# Altium PCB RD15002_SingleSCT-20151223.PcbDoc
Units mil, origin at the board's own origin, x right, y up, seen from the top; angles counter-clockwise.
Board outline 5758.03 x 3395.83 mil, 2 copper layers (Top Layer, Bottom Layer); 208 components, 168 nets, 643 pads, 210 vias.
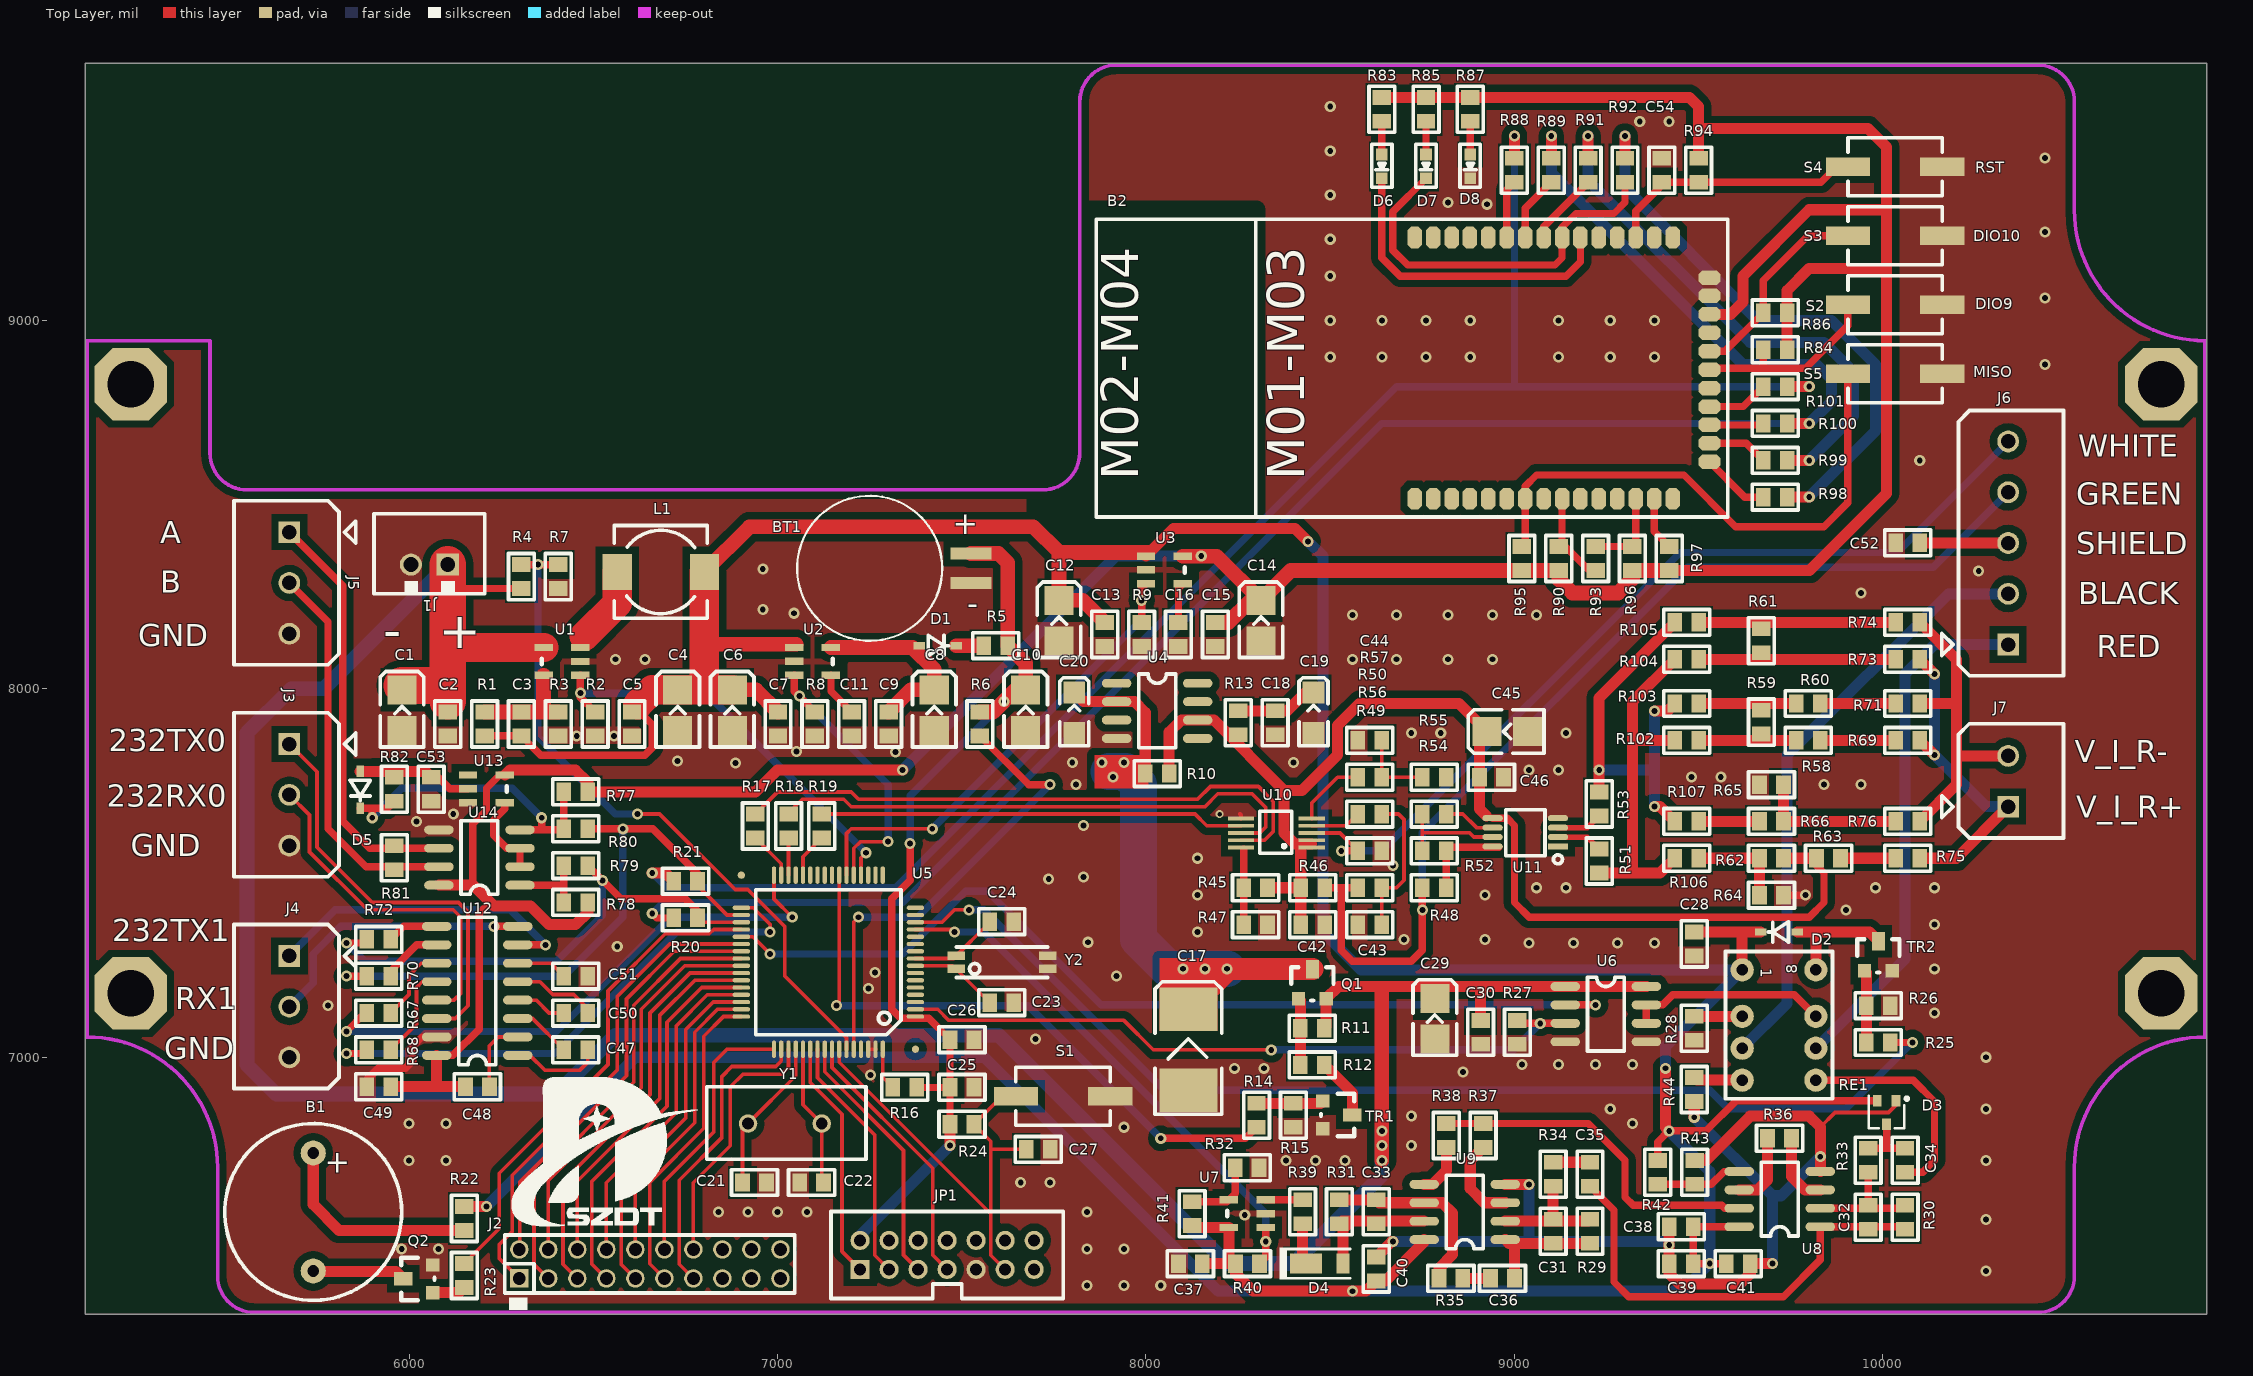
[diagram p0: Top Layer view]
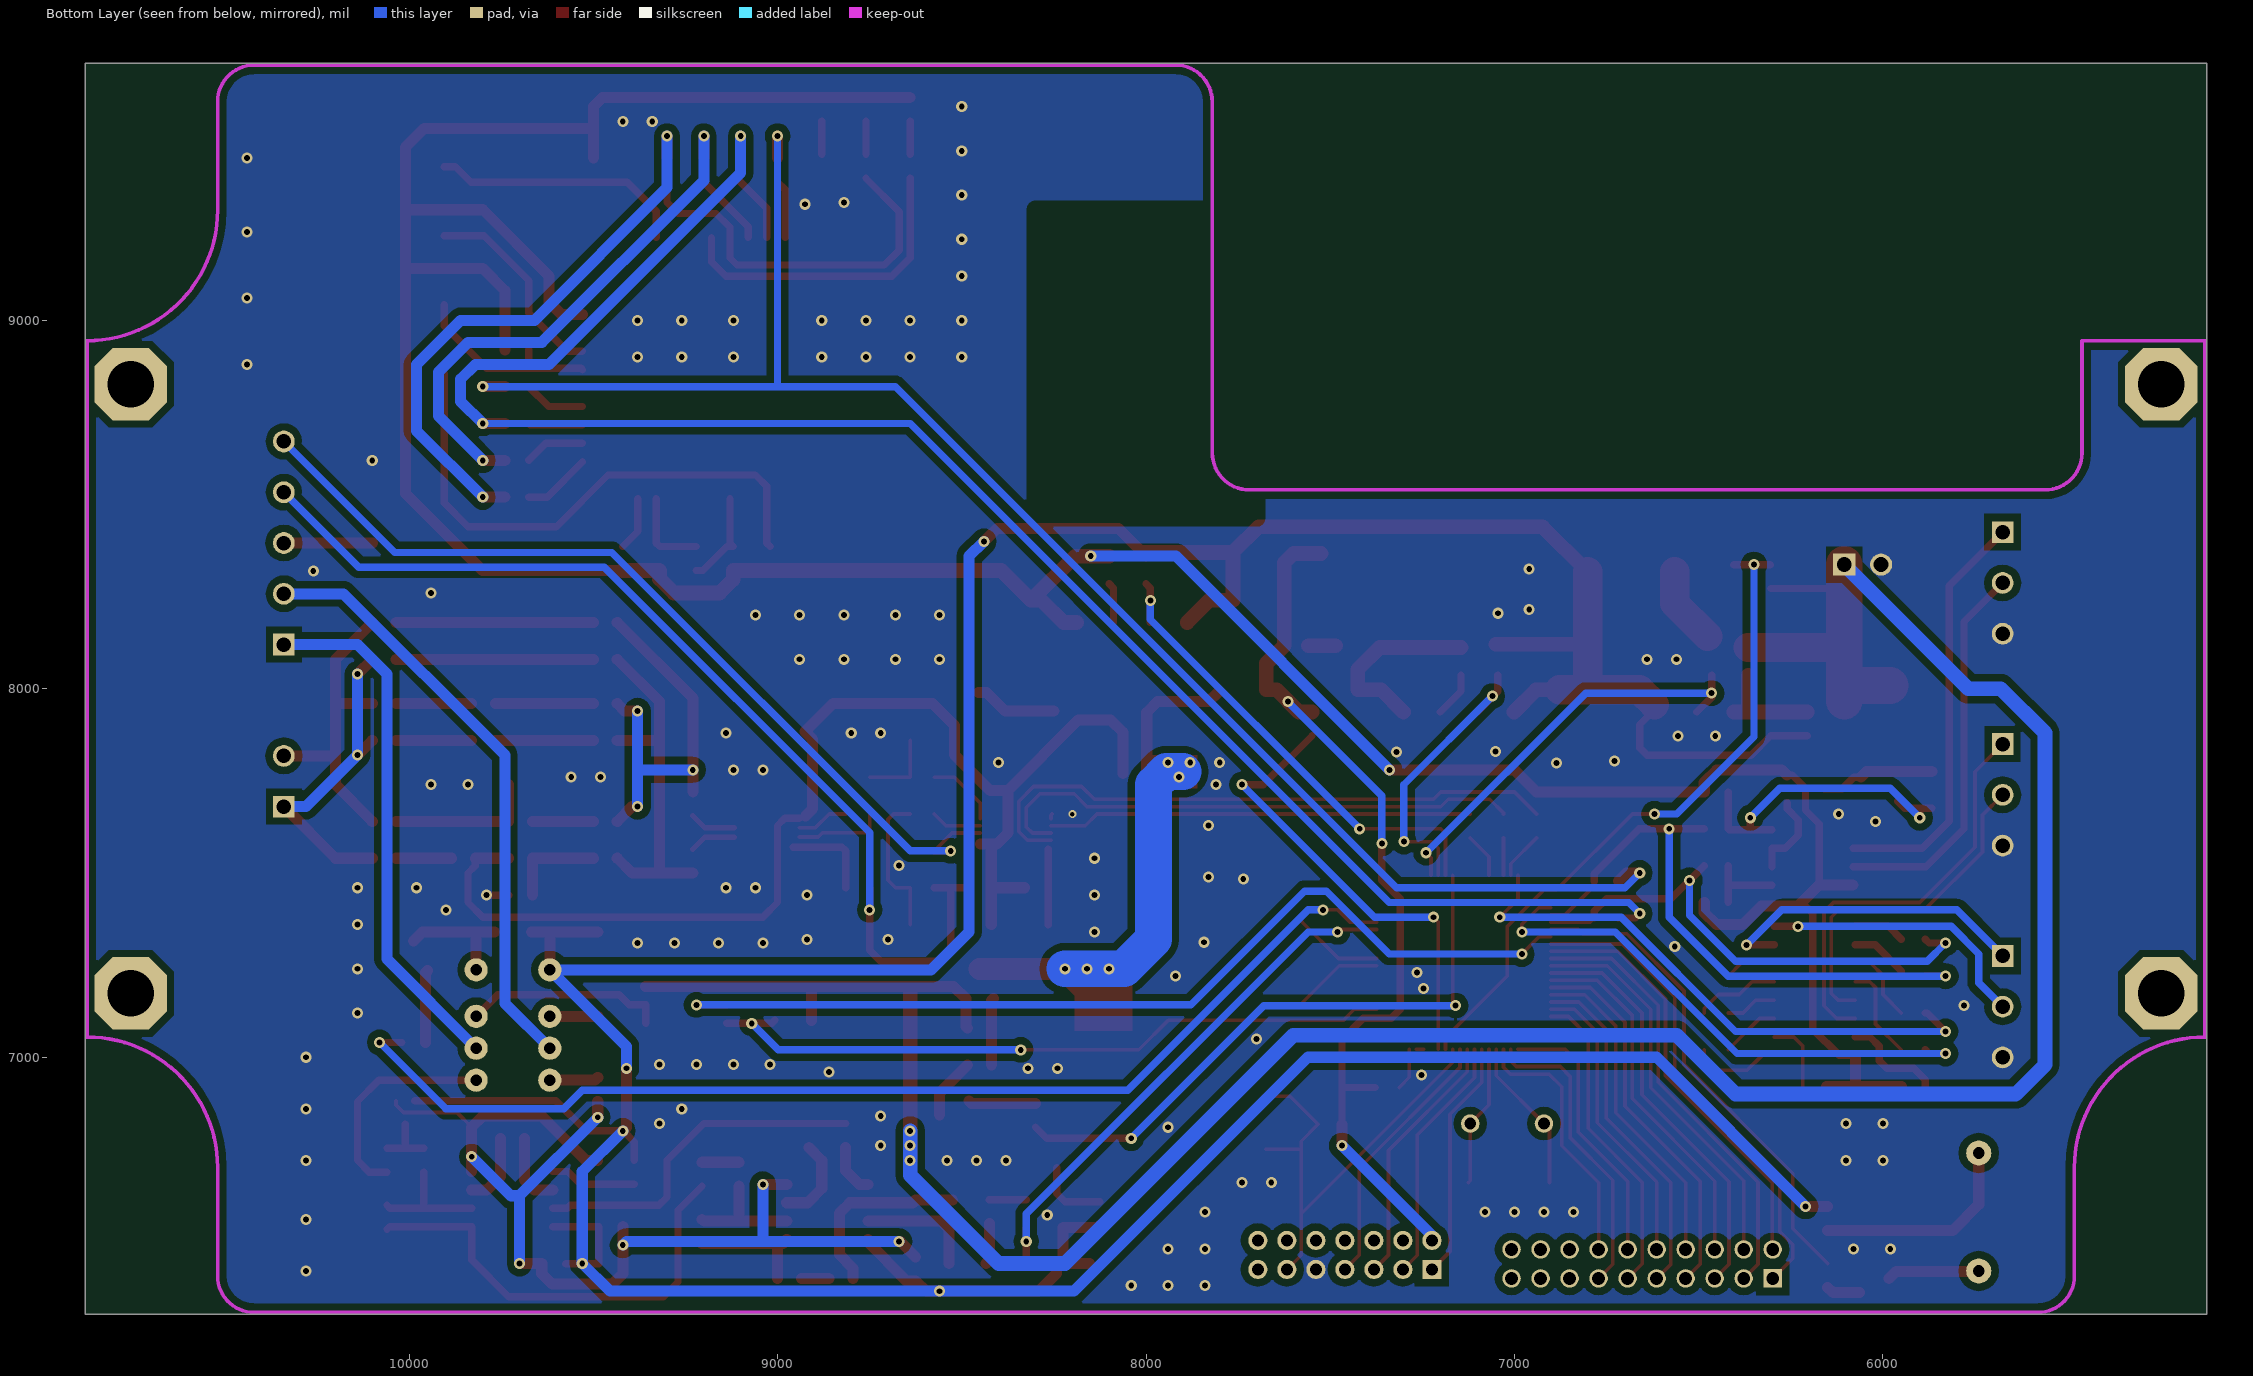
[diagram p1: Bottom Layer view, seen from below]

## Layer stack, top to bottom
Top Layer: signal copper 1.4
Dielectric: dielectric 12.6, FR-4, Dk 4.8
Bottom Layer: signal copper 1.4

## Board outline
5121,6301.97 10879.03,6301.97 10879.03,9697.8 5121,9697.8

## Design rules (kind name [scope] priority, off if disabled: settings)
Clearance [All] p1: gap=6
ComponentClearance [All] p1 off: gap=10 collisioncheckmode=3 verticalgap=10 showdistances=FALSE
HoleSize [All] p1: absolutevalues=TRUE maxlimit=1000 minlimit=1 maxpercent=80.000 minpercent=20.000
MinimumSolderMaskSliver [All] p1 off: minsoldermaskwidth=10
NetAntennae [All] p1 off: netantennaetolerance=0
PolygonConnect [All] p1: connectstyle=Direct reliefconductorwidth=10 reliefentries=4 polygonreliefangle="90 Angle" airgapwidth=10
RoutingPriority [All] p1: routingpriority=1
RoutingVias [All] p1: holewidth=20 width=50 viastyle="Through Hole" minholewidth=28 minwidth=50 maxholewidth=28 maxwidth=50
SilkToSilkClearance [All] p1 off: silktosilkclearance=10
SilkToSolderMaskClearance [IsPad] p1 off: minsilkscreentomaskgap=10 clearancetoexposedcopper=TRUE
SolderMaskExpansion [All] p1: expansion=4
Width [All] p1: maxlimit=1000 minlimit=10 preferedwidth=10
21 further rules are at their usual default settings.

## Components (designator, comment, footprint, x,y, rotation, side; value= is the part's Value field where it differs from the comment)
B1 "BEEP" BUZZER-5V 5740,6740 r270 top
B2 "JN5139" JN5139 8729.17,8516 r90 top
BT1 "MS920T" MS920T 7525,8367 r0 top
C1 "22uF/16V" CB3528 5981,7997 r270 top
C2 "0.1uF" CC0603 6105.06,7872 r90 top
C3 "100pF" CC0603 6305.06,7937 r270 top
C4 "22uF/16V" CB3528 6729.11,7997 r270 top
C5 "0.1uF" CC0603 6605.06,7872 r90 top
C6 "22uF/16V" CB3528 6877.22,7997 r270 top
C7 "0.1uF" CC0603 7001.28,7872 r90 top
C8 "22uF/16V" CB3528 7425.33,7997 r270 top
C9 "0.1uF" CC0603 7301.28,7872 r90 top
C10 "22uF/16V" CB3528 7673.44,7997 r270 top
C11 "0.1uF" CC0603 7201.28,7872 r90 top
C12 "22uF/16V" CB3528 7764.06,8240 r270 top
C13 "0.1uF" CC0603 7888.11,8115 r90 top
C14 "22uF/16V" CB3528 8312.17,8240 r270 top
C15 "0.1uF" CC0603 8188.11,8115 r90 top
C16 "0.1uF" CC0603 8088.11,8115 r90 top
C17 "100uF/20V" CD7343 8115,7130 r270 top
C18 "0.1uF" CC0603 8350.37,7875 r90 top
C19 "4.7uF/10V" CA3216 8454.74,7990 r270 top
C20 "10uF/16V" CA3216 7805,7990 r270 top
C21 "22pF" CC0603 6970,6660 r180 top
C22 "22pF" CC0603 7060,6660 r0 top
C23 "22pF" CC0603 7576,7148 r0 top
C24 "22pF" CC0603 7576,7368 r0 top
C25 "0.1uF" CC0603 7533,6918 r180 top
C26 "0.1uF" CC0603 7533,7048 r180 top
C27 "1uF" CC0603 7740,6750 r180 top
C28 "0.1uF" CC0603 9488,7340 r270 top
C29 "22uF/16V" CB3528 8783.94,7160 r270 top
C30 "0.1uF" CC0603 8908,7035 r90 top
C31 "100pF" CC0603 9105,6495 r90 top
C32 "100pF" CC0603 9960,6533 r90 top
C33 "100pF" CC0603 8625,6548 r90 top
C34 "0.1uF" CC0603 10060,6753 r270 top
C35 "0.1uF" CC0603 9205,6715 r270 top
C36 "0.1uF" CC0603 8935,6400 r0 top
C37 "0.1uF" CC0603 8088,6440 r0 top
C38 "0.1uF" CC0603 9420,6540 r0 top
C39 "0.1uF" CC0603 9420,6440 r0 top
C40 "1uF" CC0603 8625,6458 r270 top
C41 "1uF" CC0603 9640,6440 r180 top
C42 "0.1uF" CC0603 8485,7360 r180 top
C43 "1000pF" CC0603 8575,7360 r0 top
C44 "0.1uF" CC0603 8575,7860 r0 top
C45 "22uF/16V" CB3528 8925,7884.06 r0 top
C46 "0.1uF" CC0603 8970,7760 r180 top
C47 "0.1uF" CC0603 6420,7020 r0 top
C48 "0.1uF" CC0603 6218,6920 r180 top
C49 "0.1uF" CC0603 5885,6920 r0 top
C50 "0.1uF" CC0603 6485,7120 r180 top
C51 "0.1uF" CC0603 6485,7220 r180 top
C52 "Cap" CC0603 10035,8396 r0 top
C53 "100pF" CC0603 6060,7695 r90 top
C54 "1uF" CC0603 9400,9440 r270 top
D1 "CMDSH-3" SOD323 7385,8117 r0 top
D2 "CMDSH-3" SOD323 9768,7340 r180 top
D3 "DESD1P0RFW-7" SOT-323 10010,6850 r270 top
D4 "DFLS1200-7" powerDI123 8485,6440 r0 top
D5 "1N4148" SOD323 5867.44,7775.75 r270 top
D6 "LED" D0603 8640,9450 r270 top
D7 "LED" D0603 8760,9450 r270 top
D8 "LED" D0603 8880,9450 r270 top
J1 "BAT" CON2-2.54MM 6105,8337 r180 top
J2 "Header2*10" IDC20-2.0MM 6299.11,6399.63 r0 top
J3 "COM2" ECH350H-3P 5675,7850 r270 top
J4 "COM2" ECH350H-3P 5675,7275 r270 top
J5 "COM3" ECH350H-3P 5675,8425 r270 top
J6 "CON5" ECH350H-5P 10340,8120 r90 top
J7 "CON2" ECH350H-2P 10340,7680 r90 top
JP1 "JTAG" IDC14-2.0MM 7224,6424 r0 top
L1 "10uH" SLF6025 6565,8317 r0 top
Q1 "CJ2301" SOT-23W 8414,7159 r0 top
Q2 "MMBT3904" SOT-23W 6064,6361 r90 top
R1 "105K" CC0603 6205.06,7872 r90 top
R2 "100K" CC0603 6505.06,7937 r270 top
R3 "20K" CC0603 6405.06,7937 r270 top
R4 "300K" CC0603 6305,8272 r90 top
R5 "22R" CC0603 7625,8117 r180 top
R6 "100R" CC0603 7549.39,7872 r90 top
R7 "100K" CC0603 6405,8337 r270 top
R8 "100K" CC0603 7101.28,7937 r270 top
R9 "100K" CC0603 7988.11,8180 r270 top
R10 "357R" CC0603 8063,7770 r180 top
R11 "10K" CC0603 8419,7079 r0 top
R12 "10K" CC0603 8419,6979 r0 top
R13 "0R" CC0603 8250.37,7940 r270 top
R14 "10K" CC0603 8300,6875 r270 top
R15 "100K" CC0603 8400,6810 r90 top
R16 "22R" CC0603 7313,6918 r0 top
R17 "22R" CC0603 6940,7595 r90 top
R18 "22R" CC0603 7030,7595 r90 top
R19 "22R" CC0603 7120,7595 r90 top
R20 "0R" CC0603 6783,7378 r180 top
R21 "0R" CC0603 6783,7478 r180 top
R22 "470" CC0603 6150,6530 r90 top
R23 "1K" CC0603 6150,6375 r90 top
R24 "10K" CC0603 7533,6818 r180 top
R25 "10K" CC0603 9955,7040 r0 top
R26 "100K" CC0603 10020,7140 r180 top
R27 "100K" CC0603 9008,7100 r270 top
R28 "1K" CC0603 9488,7111 r270 top
R29 "100K" CC0603 9205,6495 r90 top
R30 "100K" CC0603 10060,6533 r90 top
R31 "100K" CC0603 8525,6548 r90 top
R32 "100K" CC0603 8242,6700 r0 top
R33 "4.7K" CC0603 9960,6688 r90 top
R34 "4.7K" CC0603 9105,6650 r90 top
R35 "4.7K" CC0603 8795,6400 r0 top
R36 "0R" CC0603 9752,6780 r180 top
R37 "0R" CC0603 8915,6755 r90 top
R38 "0R" CC0603 8815,6755 r90 top
R39 "1K" CC0603 8425,6613 r270 top
R40 "10K" CC0603 8243,6440 r0 top
R41 "100K" CC0603 8125,6543 r90 top
R42 "100K 1%" CC0603 9389,6720 r270 top
R43 "100K 1%" CC0603 9489,6655 r90 top
R44 "1K" CC0603 9488,6945 r270 top
R45 "0R" CC0603 8330,7460 r180 top
R46 "12K" CC0603 8420,7460 r0 top
R47 "0R" CC0603 8265,7360 r0 top
R48 "0R" CC0603 8815,7460 r180 top
R49 "25R" CC0603 8575,7460 r0 top
R50 "5K" CC0603 8640,7660 r180 top
R51 "0R" CC0603 9230,7500 r90 top
R52 "92.6K 1%" CC0603 8750,7560 r0 top
R53 "0R" CC0603 9230,7720 r270 top
R54 "2.49K 1%" CC0603 8815,7660 r180 top
R55 "25R" CC0603 8815,7760 r180 top
R56 "0R" CC0603 8640,7560 r180 top
R57 "5K" CC0603 8640,7760 r180 top
R58 "10K" CC0603 9830,7860 r180 top
R59 "10K" CC0603 9670,7877 r90 top
R60 "10K" CC0603 9765,7960 r0 top
R61 "100R" CC0603 9670,8098 r90 top
R62 "1K" CC0603 9665,7540 r0 top
R63 "0R" CC0603 9885,7540 r180 top
R64 "1K" CC0603 9665,7440 r0 top
R65 "1K" CC0603 9665,7740 r0 top
R66 "0R" CC0603 9730,7640 r180 top
R67 "0R" CC0603 5950,7120 r180 top
R68 "0R" CC0603 5950,7020 r180 top
R69 "0R" CC0603 10100,7860 r180 top
R70 "0R" CC0603 5950,7220 r180 top
R71 "0R" CC0603 10100,7960 r180 top
R72 "0R" CC0603 5950,7320 r180 top
R73 "0R" CC0603 10100,8080 r180 top
R74 "0R" CC0603 10100,8180 r180 top
R75 "0R" CC0603 10100,7540 r180 top
R76 "0R" CC0603 10100,7640 r180 top
R77 "10K" CC0603 6420,7720 r0 top
R78 "10K" CC0603 6485,7420 r180 top
R79 "0R" CC0603 6485,7520 r180 top
R80 "0R" CC0603 6485,7620 r180 top
R81 "120R" CC0603 5960,7574 r270 top
R82 "10K" CC0603 5960,7695 r90 top
R83 "200R" CC0603 8640,9540 r90 top
R84 "2.2K" CC0603 9740.17,8920 r180 top
R85 "200R" CC0603 8760,9540 r90 top
R86 "2.2K" CC0603 9740.17,9020 r180 top
R87 "200R" CC0603 8880,9540 r90 top
R88 "0R" CC0603 9000,9440 r270 top
R89 "0R" CC0603 9100,9440 r270 top
R90 "2.2K" CC0603 9120.17,8321 r90 top
R91 "0R" CC0603 9200,9440 r270 top
R92 "0R" CC0603 9300,9440 r270 top
R93 "0R" CC0603 9220.17,8321 r90 top
R94 "10K" CC0603 9500,9440 r270 top
R95 "10K" CC0603 9020.17,8321 r90 top
R96 "2.2K" CC0603 9320.17,8321 r90 top
R97 "2.2K" CC0603 9420.17,8321 r90 top
R98 "0R" CC0603 9675.17,8520 r0 top
R99 "0R" CC0603 9675.17,8620 r0 top
R100 "0R" CC0603 9675.17,8720 r0 top
R101 "0R" CC0603 9675.17,8820 r0 top
R102 "0R" CC0603 9435,7860 r0 top
R103 "0R" CC0603 9435,7960 r0 top
R104 "0R" CC0603 9435,8080 r0 top
R105 "0R" CC0603 9435,8180 r0 top
R106 "0R" CC0603 9435,7540 r0 top
R107 "0R" CC0603 9435,7640 r0 top
RE1 "G6K" G6K 9618,7237 r270 top
S1 "RESET" SPST 7903,6894 r180 top
S2 "DIO9" SPST 9905,9042.04 r0 top
S3 "DIO10" SPST 9905,9229.52 r0 top
S4 "RST" SPST 9905,9417 r0 top
S5 "MISO" SPST 9905,8854.56 r0 top
TR1 "MMBT3904" SOT-23W 8480,6881 r270 top
TR2 "MMBT3904" SOT-23W 9950,7235 r0 top
U1 "TPS560200" SOT-23-5 6465,8037 r270 top
U2 "LP2985-25" SOT-23-5 7045,8112 r90 top
U3 "LP2985-25" SOT-23-5 8000,8360 r90 top
U4 "LT1019AIS8-5" SO-8 7920.37,8015 r0 top
U5 "MSP430F1X/2X/4X" LQFP64 7138,7258 r180 top
U6 "FAN3122" SO-8 9138,7192 r0 top
U7 "TLV3491AID" SOT-23-5 8325,6538 r270 top
U8 "LT1807" SO-8 9830,6540 r180 top
U9 "LT1807" SO-8 8975,6505 r180 top
U10 "LTC2402" MS10 8450,7569 r90 top
U11 "AD8420" MSOP8 9118,7572 r180 top
U12 "MAX3232" SO-16 6295,7005 r180 top
U13 "74HC1G14" SOT-23-5 6160,7766 r90 top
U14 "SN65HVD72/75/78" SO-8 6301,7467 r180 top
Y1 "1M" XCYAI 7020,6820 r180 top
Y2 "32.768KHz" MC-146 7485,7240 r0 top
? "" LOGO 6505,6745 r0 top

## Footprints (in the part's own frame and the unit in brackets; to place one, negate y for a bottom-side part, rotate by r counter-clockwise, add the part's x,y. Pads: shape width x height; smd on the part's side, far side on the other; paste and mask are expansions set on the pad)
BUZZER-5V [mil]
  round 68 hole 32: 1(0,0) 2(320,0)
  silkscreen extent -80,-240 400,240
CA3216 [mm]
  rect 1.5x1.5 smd: 1(0,0) 2(2.794,0)
  silkscreen extent -1.02,-1 3.68,1
CB3528 [mm]
  rect 2x2 smd: 1(0,0) 2(2.794,0)
  silkscreen extent -1.27,-1.5 3.94,1.5
CC0603 [mil]
  rect 40x50 smd: 1(0,0) 2(65,0)
  silkscreen extent -30,-35 95,35
CD7343 [mm]
  rect 3x4 smd: 1(0,0) 2(5.588,0)
  silkscreen extent -1.91,-2.3 7.24,2.3
CON2-2.54MM [mil]
  rect 60x60 hole 40: 1(0,0)
  round 60 hole 40: 2(100,0)
  silkscreen extent -100,-138 200,79
D0603 [mm]
  rect 0.8x0.8 smd: 1(0,0) 2(1.65,0)
  silkscreen extent -0.7,-0.7 2.25,0.7
ECH350H-2P [mm]
  rect 1.5x1.5 hole 1: 1(0,0)
  round 1.5 hole 1: 2(3.5,0)
  silkscreen extent -2.16,-3.81 5.71,4.57
ECH350H-3P [mm]
  rect 1.5x1.5 hole 1: 1(0,0)
  round 1.5 hole 1: 2(3.5,0) 3(7,0)
  silkscreen extent -2.16,-3.81 9.14,4.57
ECH350H-5P [mm]
  rect 1.5x1.5 hole 1: 1(0,0)
  round 1.5 hole 1: 2(3.5,0) 3(7,0) 4(10.5,0) 5(14,0)
  silkscreen extent -2.16,-3.81 16.13,4.57
G6K [mm]
  round 1.6 hole 0.8: 1(0,0) 2(3.2,0) 3(5.4,0) 4(7.6,0) 5(7.6,5.08) 6(5.4,5.08) 7(3.2,5.08) 8(0,5.08)
  silkscreen extent -1.27,-1.14 8.89,6.22
IDC14-2.0MM [mil]
  rect 52x52 hole 32: 1(0,0)
  round 52 hole 32: 2(0,78.74) 3(78.74,0) 4(78.74,78.74) 5(157.48,0) 6(157.48,78.74) 7(236.22,0) 8(236.22,78.74) 9(314.96,0) 10(314.96,78.74) 11(393.7,0) 12(393.7,78.74) 13(472.44,0) 14(472.44,78.74)
  silkscreen extent -79,-79 551,157
IDC20-2.0MM [mm]
  rect 1.27x1.27 hole 0.889: 1(0,0)
  round 1.27 hole 0.889: 2(0,2) 3(2,0) 4(2,2) 5(4,0) 6(4,2) 7(6,0) 8(6,2) 9(8,0) 10(8,2) 11(10,0) 12(10,2) 13(12,0) 14(12,2) 15(14,0) 16(14,2) 17(16,0) 18(16,2) 19(18,0) 20(18,2)
  silkscreen extent -1.03,-2.17 19,3
JN5139 [mm]
  oct 1.5x1 smd: 1(0,0) 2(0,-1.27) 3(0,-2.54) 4(0,-3.81) 5(0,-5.08) 6(0,-6.35) 7(0,-7.62) 8(0,-8.89) 9(0,-10.16) 10(0,-11.43) 11(0,-12.7) 12(0,-13.97) 13(0,-15.24) 14(0,-16.51) 15(0,-17.78) 27(18,-17.78) 28(18,-16.51) 29(18,-15.24) 30(18,-13.97) 31(18,-12.7) 32(18,-11.43) 33(18,-10.16) 34(18,-8.89) 35(18,-7.62) 36(18,-6.35) 37(18,-5.08) 38(18,-3.81) 39(18,-2.54) 40(18,-1.27) 41(18,0)
  oct 1x1.5 smd: 16(2.54,-20.32) 17(3.81,-20.32) 18(5.08,-20.32) 19(6.35,-20.32) 20(7.62,-20.32) 21(8.89,-20.32) 22(10.16,-20.32) 23(11.43,-20.32) 24(12.7,-20.32) 25(13.97,-20.32) 26(15.24,-20.32)
  silkscreen extent -1.27,-21.59 19.27,21.95
LOGO [mil]
  silkscreen extent -227,-203 278,200
LQFP64 [mm]
  oval 1.2x0.3 smd: 1(-6,3.75) 2(-6,3.25) 3(-6,2.75) 4(-6,2.25) 5(-6,1.75) 6(-6,1.25) 7(-6,0.75) 8(-6,0.25) 9(-6,-0.25) 10(-6,-0.75) 11(-6,-1.25) 12(-6,-1.75) 13(-6,-2.25) 14(-6,-2.75) 15(-6,-3.25) 16(-6,-3.75) 33(6,-3.75) 34(6,-3.25) 35(6,-2.75) 36(6,-2.25) 37(6,-1.75) 38(6,-1.25) 39(6,-0.75) 40(6,-0.25) 41(6,0.25) 42(6,0.75) 43(6,1.25) 44(6,1.75) 45(6,2.25) 46(6,2.75) 47(6,3.25) 48(6,3.75)
  oval 0.3x1.2 smd: 17(-3.75,-6) 18(-3.25,-6) 19(-2.75,-6) 20(-2.25,-6) 21(-1.75,-6) 22(-1.25,-6) 23(-0.75,-6) 24(-0.25,-6) 25(0.25,-6) 26(0.75,-6) 27(1.25,-6) 28(1.75,-6) 29(2.25,-6) 30(2.75,-6) 31(3.25,-6) 32(3.75,-6) 49(3.75,6) 50(3.25,6) 51(2.75,6) 52(2.25,6) 53(1.75,6) 54(1.25,6) 55(0.75,6) 56(0.25,6) 57(-0.25,6) 58(-0.75,6) 59(-1.25,6) 60(-1.75,6) 61(-2.25,6) 62(-2.75,6) 63(-3.25,6) 64(-3.75,6)
  round 0.5 smd: ""(-6,6) ""(6,-6)
  silkscreen extent -5,-5 5,5
MC-146 [mm]
  rect 1.2x0.6 smd: 1(0,0) 2(6.3,0) 3(6.3,0.9) 4(0,0.9)
  silkscreen extent 0,-0.6 6.3,1.5
MS10 [mm]
  rect 0.254x1.8 smd: 1(0,0) 2(0.5,0) 3(1,0) 4(1.5,0) 5(2,0) 6(2,4.88) 7(1.5,4.88) 8(1,4.88) 9(0.5,4.88) 10(0,4.88)
  silkscreen extent -0.4,1.38 2.5,3.58
MS920T [mm]
  rect 2.8x0.8 smd: 1(0,0) 2(0,-2.032)
  silkscreen extent -11.98,-6.02 -1.99,3.98
MSOP8 [mm]
  rect 1.4x0.42 smd: 1(0,0)
  oval 1.4x0.42 smd: 2(0,-0.65) 3(0,-1.3) 4(0,-1.95) 5(4.5,-1.95) 6(4.5,-1.3) 7(4.5,-0.65) 8(4.5,0)
  silkscreen extent -0.31,-2.54 3.61,1.2
powerDI123 [mm]
  rect 2.2x1.4 smd: 1(-1.275,0)
  rect 0.9x1.4 smd: 2(1.275,0)
  silkscreen extent -3.1,-1.09 1.76,1.09
SLF6025 [mm]
  rect 2x2.5 smd: 1(0,0) 2(6,0)
  silkscreen extent -0.2,-3.2 6.2,3.2
SO-8 [mil]
  oval 80x24 smd: 1(0,0) 2(0,-50) 3(0,-100) 4(0,-150) 5(220,-150) 6(220,-100) 7(220,-50) 8(220,0)
  silkscreen extent 60,-175 160,25
SO-16 [mil]
  oval 80x24 smd: 1(0,0) 2(0,-50) 3(0,-100) 4(0,-150) 5(0,-200) 6(0,-250) 7(0,-300) 8(0,-350) 9(220,-350) 10(220,-300) 11(220,-250) 12(220,-200) 13(220,-150) 14(220,-100) 15(220,-50) 16(220,0)
  silkscreen extent 60,-375 160,25
SOD323 [mm]
  rect 0.8x0.5 smd: 1(0,0) 2(2.54,0)
  silkscreen extent 0.61,-0.7 2.01,0.7
SOT-23-5 [mil]
  rect 20x50 smd: 1(0,0) 2(-37,0) 3(-75,0) 4(-75,-100) 5(0,-100)
  silkscreen extent -45,-105 -30,-105
SOT-23W [mil]
  rect 35.98x35.98 smd: 1(0,0) 2(75,0)
  rect 35.98x50 smd: 3(37.99,80)
  silkscreen extent -20,-5 95,85
SOT-323 [mm]
  rect 0.8x0.6 smd: 1(-0.8,0.65) 2(-0.8,-0.65) 3(0.8,0)
  silkscreen extent -1.14,-1.22 1.09,1.49
SPST [mil]
  rect 120x50 smd: 1(0,0) 2(256,0)
  silkscreen extent 0,-79 256,79
XCYAI [mil]
  round 50 hole 32: 1(-100,0) 2(100,0)
  silkscreen extent -220,-100 212,97

## Free pads (board coordinates)
  oct 196.85x196.85 hole 125.98: 1(10755.91,7173.14) 2(10755.91,8826.68) 3(5244.09,8826.68) 4(5244.09,7173.14)

## Via types
v1: diameter 30, hole 16, Top Layer to Bottom Layer, 209 vias
v2: diameter 22, hole 12, Top Layer to Bottom Layer, 1 vias

## Nets (pads, with @x,y where several pads share a name; then routed paths per layer and width w, separated by ;. In a path a pad name is that pad's centre, name@x,y a point inside that pad or via, vN(x,y) a via of type N, cw(c..) or ccw(c..) an arc to the next point about the centre after c; other vN are vias at no path point)
+3V: C8.1 C9.2 D1.1 U2.5 | length 509.5
  Top Layer w40: U2.5 7366,8112 7425.33,8052.67 C8.1 7361.28,7997 C9.2
+3V_MCU: BT1.1 C10.1 C25.2 C26.2 JP1.2 R5.1 R6.2 R16.2 R24.2 U5.1 | length 2514
  Top Layer w20: v1(7360,7580) 7360,7480 7310,7430 7310,7130 7334,7106 7410,7106 C26.2 R24.2 ; R16.2 C25.2
  Top Layer w30: v1(7468,6760) R24.2
  Top Layer w40: BT1.1 7600,8367 7625,8342 R5.1 7673.44,8068.56 C10.1 7645,7997 7585,7937 R6.2
  Bottom Layer w20: v1(7360,7580) 7360,7710 v1(7615,7965)
  Bottom Layer w30: JP1.2 7224,6516 v1(7468,6760)
+3V_ZIGBEE: B2.24 C14.1 C15.2 C48.2 C49.2 R77.2 R78.1 R83.2 R84.1 R85.2 R86.1 R87.2 R90.1 R94.1 R95.1 R96.1 R97.1 U3.5 U12.16 U13.5 U14.8 | length 9705
  Top Layer w20: U12.16 6119,7005 6190,7076 6190,7390.4 6219.6,7420 ; 6173,7467 6173,7633 6210,7670 6210,7730 6246,7766 U13.5
  Top Layer w30: C49.2 C48.2 ; 6075,6920 U12.16 ; U14.8 6173,7467 6230,7410 6330,7410 6380,7360 6452,7360 6485,7393 R78.1 ; U13.5 6274,7780 6451,7780 6485,7746 R77.2 6940,7720 7000,7780 v1@7340,7780 ; R83.2 9475,9605 9500,9580 R94.1 ; R97.1 9801,8321 10010,8530 10010,9470 9960,9520 9500,9520 ; B2.24 9586,9016 9620,9050 9620,9120 9800,9300 10010,9300 ; R84.1 9740.17,9080.17 9800,9140 10010,9140
  Top Layer w40: U3.5 8192.17,8360 C14.1 ; C15.2 8224,8180 8284,8240 C14.1 ; R97.1 R96.1 9320.17,8298.17 9282,8260 9157,8260 9120.17,8296.83 R90.1 8393.17,8321 C14.1
  Bottom Layer w30: v1(7339,7780) 7919,8360 v1(8150,8360)
+5V: C3.2 C4.1 C5.2 C6.1 C7.2 C12.1 C13.2 C28.1 C37.2 C38.2 C39.2 C40.2 C41.2 D2.2 D3.2 L1.2 R1.1 R22.2 R40.1 R41.1 R42.1 RE1.1 U2.1 U3.1 U7.5 U8.8 U9.8 | length 12887.8
  Top Layer w20: R1.1 C3.2 6357.06,7820 6640,7820 6660,7840 6660,7903 6626,7937 C5.2 ; R42.1 9389,6770 9419,6800 9520,6800 9601.5,6881.5 D3.2 ; C41.2 C39.2 C38.2 U8.8
  Top Layer w30: R22.2 v1(6210,6595) ; U3.1 8075,8435 8405,8435 v1(8440,8400) ; R41.1 8130,6538 U7.5 R40.1@8225,6441 ; C37.2 R40.1 8243,6413 8291,6365 8597,6365 C40.2 8650,6393 8755,6498 U9.8 ; v1(9410,6970) 9410,6810 v1(9420,6800) ; C28.1 D2.2 ; RE1.1 9618,7340
  Top Layer w40: 6801.22,8121 U2.1@7050,8121 ; L1.2 6924.22,8440 7694,8440 7764,8370 8005,8370 ; C6.1 6941.28,7997 C7.2 ; 7764.06,8369.94 C12.1 7828.11,8240 C13.2
  Top Layer w80: 6620,7957 6660,7997 C6.1 ; 6801.22,7997.22 L1.2
  Bottom Layer w30: v1(6210,6595) 6615,7000 7560,7000 8195,6365 9455,6365 v1(9530,6440) 9530,6690 v1(9420,6800) ; v1(8440,8400) 8480,8360 8480,7340 8583,7237 RE1.1 9410,7029 v1(9410,6970)
  other v1: 8560,6365
+5V_ADC: C42.2 C45.1 C46.2 R10.1 R13.2 R45.1 R46.1 R62.2 R63.2 U4.6 U10.1 U10.2 U11.5 | length 3366.3
  Top Layer w20: U11.5 8980.23,7648.77 9000,7629 9000,7420 9040,7380 9800,7380 9840,7420 9840,7500 9820,7520 R63.2
  Top Layer w30: R10.1 8063,7882 8096,7915 8184,7915 8375,7724 ; R45.1 R46.1 ; C42.2 8420,7579 ; 8449,7579 8405,7579 8375,7609 8375,7724 ; U11.5@8924,7655 8905,7674 8905,7864.06 C45.1 8849.06,7960 8580,7960 8520,7900 8520,7820 8424,7724 8375,7724 ; R62.2 R63.2
+VIN: C17.1 C20.1 Q1.3 R10.2 U4.2 | length 1551.1
  Top Layer w30: C20.1 7830,7965 7969,7965 7998,7936 R10.2
  Top Layer w60: C17.1 8224,7239 Q1.3
  Bottom Layer w100: 7900,7775 7945,7775 7980,7740 7980,7320 8060,7240 v1(8220,7240)
  other v1: 8100,7240 8160,7240 7910,7760 7880,7800 7940,7800
A: J5.1 R81.1 U14.6 | length 1136.3
  Top Layer w20: J5.1 5820,8280 5820,7640 5893,7567 U14.6
AD_BAT: R4.2 R7.1 U5.59 | length 1852.2
  Top Layer w10: v1(6620,7660) 6680,7660 6885,7455 6919,7455 7020,7354 7020,7220 7187.21,7052.79 U5.59
  Top Layer w20: R4.2 R7.1
  Bottom Layer w20: v1(6350,8337) 6350,7870 6560,7660 v1(6620,7660)
AD_MCUVOL: R6.1 U5.60 | length 1278.1
  Top Layer w10: U5.60 7206.9,7366.9 v1(7220,7380)
  Top Layer w20: R6.1 7681.39,7740 v1(7740,7740)
  Bottom Layer w20: v1(7220,7380) 7380,7380 v1(7740,7740)
ADC_IN+: R51.1 R102.1 R104.1 R106.1 | length 964.2
  Top Layer w30: R51.1 9395,7500 R106.1 ; 9320,7500 9320,7965 R104.1 ; 9320,7860 R102.1
ADC_IN-: R53.1 R103.1 R105.1 R107.1 | length 1089.8
  Top Layer w30: R53.1 9230,7975 R105.1 ; v1(9380,7680) 9395,7680 R107.1 ; v1(9380,7940) 9415,7940 R103.1
  Bottom Layer w30: v1(9230,7780) 9380,7780 ; v1(9380,7680) v1(9380,7940)
ADC_VOL: R48.1 R52.2 U11.8 | length 247.1
  Top Layer w20: R48.1 R52.2 8825,7570 U11.8@8958,7570
AGND: C38.1 C39.1 C40.1 C41.1 D3.1 R43.2 R44.2 U8.4 U9.4 | length 2960.2
  Top Layer w10: 9830,6810 9870,6850 10015,6850 10035.59,6870.59 D3.1
  Top Layer w30: C40.1 8667,6500 v1(8670,6500) ; U9.4 v1(9040,6655) ; C38.1 9420,6413 9448,6385 9612,6385 9640,6413 C41.1 v1(9700,6440) ; v1(9488,6837) R44.2 ; R43.2 9520,6720 9640,6840 9800,6840 9830,6810 U8.4
  Bottom Layer w30: v1(8670,6500) 9410,6500 v1(9420,6490) ; 9040,6500 v1(9040,6655) ; v1(9488,6837) 9700,6625 v1(9700,6440) ; 9700,6624 9724,6624 v1(9830,6730)
B: J5.2 R81.2 U14.7 | length 1054.4
  Top Layer w20: J5.2 5780,8182.2 5780,7620 5883,7517 U14.7
BAT+: C1.1 C2.2 C29.1 C30.2 J1.1 Q1.2 R4.1 R11.2 U1.4 U6.1 U6.8 | length 7740.7
  Top Layer w20: 6132,8272 R4.1
  Top Layer w30: R11.2 8489,7084 Q1.2 8522,7192 U6.8 ; C30.2 8908,7192
  Top Layer w40: v1(8640,6720) 8640,7187
  Top Layer w80: 6105,8112 U1.4
  Top Layer w100: C1.1@5981,8009 6105,8009 ; 6105,7967 J1.1
  Bottom Layer w40: J1.1 5768,8000 5680,8000 5560,7880 5560,6980 5640,6900 6400,6900 6560,7060 7600,7060 8220,6440 8400,6440 8640,6680 v1(8640,6800)
  other v1: 8640,6760
BEEP: R23.2 U5.36 | length 1332.3
  Top Layer w10: R23.2 6245,6535 6245,6685 6540,6980 6540,7180 6695,7335 6815,7335 6826.58,7346.58 U5.36
BLACK: J6.2 RE1.3 | length 1627.5
  Bottom Layer w30: RE1.3 9740,7146.4 9740,7820 10177.8,8257.8 J6.2
BLACK_R: R44.1 RE1.4 | length 133
  Top Layer w30: R44.1 9495.21,6937.79 RE1.4
BLACK_T: R28.1 RE1.2 | length 130
  Top Layer w30: R28.1 RE1.2
CURRENT+: R61.1 R73.2 R104.2 | length 535
  Top Layer w30: R104.2 R73.2
CURRENT-: R61.2 R74.2 R105.2 | length 535
  Top Layer w30: R105.2 R74.2
DGND: B2.25 B2.26 BT1.2 C1.2 C2.1 C4.2 C5.1 C6.2 C7.1 C8.2 C9.1 C10.2 C11.1 C12.2 C13.1 C14.2 C15.1 C16.1 C17.2 C18.1 C19.2 C20.2 C21.1 C22.1 C23.2 C24.2 C25.1 C26.1 C27.1 C28.2 C29.2 C30.1 C37.1 C42.1 C43.1 C44.1 C45.2 C46.1 C49.1 C51.1 C52.1 C53.1 C54.1 D8.2 J1.2 J3.3 J4.3 J5.3 JP1.9 Q2.2 R2.2 R3.2 R7.2 R8.2 R9.2 R15.1 R26.1 R27.2 R28.2 R32.2 R47.2 R56.1 R64.2 R65.1 S1.1 S2.2 S3.2 S4.2 S5.2 TR1.2 TR2.2 U1.2 U2.2 U3.2 U4.4 U5.62 U5.63 U6.4 U6.5 U7.2 U10.6 U11.4 U12.15 U13.3 U14.5 Y2.2 Y2.3 | length 373.6
  Top Layer w10: U5.62 U5.63 ; 8255,7660 8257.87,7657.13 U10.6
  Top Layer w20: C49.1 5885,6939 5916,6970 5990,6970 6010,6990 6010,7030 6035,7055 U12.15 ; R64.2 v1(9790,7440)
  other v1: 7840,6380 7940,6380 8040,6380 10280,6420 5980,6480 6080,6480 7840,6480 7940,6480 10280,6560 8268,6572 6840,6580 6920,6580 7000,6580 7080,6580 7840,6580 7660,6660 7740,6660 6000,6720 6100,6720 8380,6720 8460,6720 8540,6720 10280,6720 8720,6760 7940,6810 6000,6820 6100,6820 9320,6820 8720,6840 9260,6860 10280,6860 7252,6952 8860,6960 8240,6970 8320,6970 9020,6980 9120,6980 9220,6980 9320,6980 10280,7000 7700,7050 10140,7120 5780,7140 7247,7187 7920,7220 7265,7230 10140,7240 6565,7300 9040,7310 9160,7310 9280,7310 9380,7310 7843,7312 8700,7320 8920,7320 8140,7340 10140,7360 9900,7400 8140,7440 8920,7440 9060,7460 9140,7460 9980,7460 10140,7460 7736,7484 7830,7489 8670,7520 8140,7540 7830,7629 6020,7640 6120,7660 7810,7740 9840,7740 9940,7740 9480,7760 9560,7760 9040,7780 9120,7780 6886,7798 7800,7800 8400,7800 6729,7804 7320,7828 7052,7830 6455,7872 6556,7872 8720,7880 8800,7880 9140,7880 6560,8080 6640,8080 8560,8080 8680,8080 8820,8080 8940,8080 8560,8200 8680,8200 8820,8200 8940,8200 9060,8200 7045,8205 6960,8215 9940,8260 10260,8320 6960,8325 10100,8620 10440,8880 8500,8900 8640,8900 8760,8900 8880,8900 9120,8900 9260,8900 9380,8900 8500,9000 8640,9000 8760,9000 8880,9000 9120,9000 9260,9000 9380,9000 10440,9060 8500,9120 8500,9220 10440,9240 8925,9315 8820,9320 8500,9340 10440,9440 8500,9460 9340,9540 9420,9540 8500,9580
  other v2: 8200,7660
DIO9: B2.21 R84.2 S2.1 | length 532
  Top Layer w20: B2.21 9533.17,8870 9790,8870 9905,8985 S2.1 ; 9675.17,8870.17 R84.2
DIO10: B2.22 R86.2 S3.1 | length 557.3
  Top Layer w20: B2.22 9571.17,8916 R86.2 9675.17,9108.17 9796.52,9229.52 S3.1
DIO16: B2.32 D6.2 | length 856.6
  Top Layer w20: D6.2 8640,9170 8690,9120 9140,9120 9179.17,9159.17 B2.32
DRIVER_EN: R27.1 U5.2 U6.3 | length 1904.5
  Top Layer w10: U5.2 7434.95,7130.05 7465,7100 7940,7100 8020,7020 v1(8340,7020)
  Top Layer w20: R27.1 9016,7092 U6.3
  Bottom Layer w20: v1(8340,7020) 8998,7020 v1(9070,7092)
GREEN: J6.4 R46.2 R48.2 R49.1 | length 2857.3
  Top Layer w20: R46.2 R49.1 ; 8530,7460 8530,7290 8560,7260 8720,7260 8750,7290 R48.2
  Bottom Layer w20: v1(8750,7400) 8750,7610 9470,8330 10136.61,8330 J6.4
LT_RTD1: R55.1
MCUMISO: R18.1 U5.30 | length 100.9
  Top Layer w10: U5.30 7029.73,7594.73 R18.1
MCUMOSI: U5.29
MCURXD0: R68.2 U5.33 | length 1463
  Top Layer w10: U5.33 6934.36,7405.64 6980,7360 v1(6980,7340)
  Top Layer w20: v1(5830,7010) 5875,7010 R68.2
  Bottom Layer w20: v1(5830,7010) 6396,7010 6726,7340 v1(6980,7340)
MCURXD1: R20.1 R72.2 R79.1 U5.35 | length 1413.2
  Top Layer w10: R20.1 6794.73,7366.27 U5.35
  Top Layer w20: v1(5830,7310) 5875,7310 R72.2 ; R79.1 6575,7430 6750,7430 6783,7397 R20.1
  Bottom Layer w20: v1(5830,7310) 5880,7260 6400,7260 6525,7385 v1(6525,7480)
MCUSCK: R17.1 U5.31 | length 129.8
  Top Layer w10: R17.1 7010.05,7524.95 U5.31
MCUTXD0: R67.2 U5.32 | length 1548.9
  Top Layer w10: U5.32 6990.36,7429.64 v1(7040,7380)
  Top Layer w20: v1(5830,7070) 5880,7120 R67.2
  Bottom Layer w20: v1(5830,7070) 6400,7070 6710,7380 v1(7040,7380)
MCUTXD1: R21.1 R70.2 R80.1 U5.34 | length 1643.7
  Top Layer w10: R21.1 6783,7466 6863.05,7385.95 U5.34
  Top Layer w20: v1(5830,7220) R70.2 ; R80.1 6661,7620 6783,7498 R21.1
  Bottom Layer w20: v1(5830,7220) 6420,7220 6580,7380 v1(6580,7620)
NetB1_1: B1.1 R22.1 | length 579
  Top Layer w30: B1.1 5740,6600 5810,6530 R22.1
NetB1_2: B1.2 Q2.3 | length 251.3
  Top Layer w30: B1.2@5741,6419 5963.99,6419 Q2.3
NetB2_9: B2.9 R90.2 R93.1 | length 260.7
  Top Layer w20: B2.9 9129.17,8395 R90.2 9138,8386 9203,8321 R93.1
NetB2_13: B2.13 R93.2 R96.2 | length 233.7
  Top Layer w20: R93.2 R96.2 9329.17,8395 B2.13
NetB2_14: B2.14 R97.2 | length 147
  Top Layer w20: B2.14 9379.17,8427 R97.2
NetB2_29: B2.29 C54.2 R94.2 S4.1 | length 697.4
  Top Layer w20: B2.29 9329.17,9296.17 9408,9375 9832,9375 9874,9417 S4.1
NetC3_1: C3.1 R1.2 R3.1 U1.5 | length 300
  Top Layer w40: R1.2 R3.1 ; 6365,7937 U1.5
NetC11_2: C11.2 U2.4 | length 123.3
  Top Layer w20: U2.4 7145,7993.28 C11.2
NetC16_2: C16.2 U3.4 | length 109.9
  Top Layer w20: C16.2 8088.11,8273.11 U3.4
NetC18_2: C18.2 C19.1 R13.1 | length 225.1
  Top Layer w30: R13.1 8383,7940 8433,7990 C19.1
NetC21_2: C21.2 U5.52 Y1.2 | length 421.6
  Top Layer w10: C21.2 6905,6805 Y1.2 7049.42,6949.42 U5.52
NetC22_2: C22.2 U5.53 Y1.1 | length 384.9
  Top Layer w10: U5.53 7069.1,6870.9 Y1.1 7120,6665 C22.2
NetC23_1: C23.1 U5.8 Y2.1 | length 243.3
  Top Layer w10: U5.8 7475.84,7248.16 C23.1
NetC24_1: C24.1 U5.9 Y2.4 | length 244.2
  Top Layer w10: U5.9 7477.41,7267.84 7576,7366.43 C24.1
NetC31_1: C31.1 C36.2 R29.1 U9.1 | length 329.1
  Top Layer w30: U9.1 8985,6495 R29.1 ; C36.2 U9.1@9000,6495
NetC31_2: C31.2 R29.2 R34.1 U9.2 | length 322.1
  Top Layer w30: U9.2 9200,6555 R29.2 ; C31.2 R34.1
NetC32_1: C32.1 C35.2 R30.1 U8.1 | length 1227.8
  Top Layer w20: C35.2 9270,6585 9270,6390 9310,6350 9730,6350 9830,6450 U8.1 10053,6540 R30.1
NetC32_2: C32.2 R30.2 R33.1 U8.2 | length 323.3
  Top Layer w20: U8.2 10052,6590 R30.2 ; C32.2 R33.1
NetC33_1: C33.1 D4.2 R31.1 U9.7 | length 346.6
  Top Layer w30: R31.1@8532,6555 U9.7 ; D4.2 8535.2,6534.2 8556,6555
NetC33_2: C33.2 R31.2 R35.1 U9.6 | length 514.2
  Top Layer w30: R31.2 C33.2 8633,6605 8804,6605 8832,6577 8832,6464 8795,6427 R35.1
NetC34_1: C34.1 D3.3 R33.2 | length 165.5
  Top Layer w20: R33.2 C34.1 ; 10010,6753 D3.3
NetC35_1: C35.1 R34.2 | length 100
  Top Layer w30: R34.2 C35.1
NetC36_1: C36.1 R35.2 | length 75
  Top Layer w30: R35.2 C36.1
NetC43_2: C43.2 R49.2 R50.1 | length 399.5
  Top Layer w10: C43.2 R49.2 8680,7460 8700,7480 8700,7645 8685,7660 R50.1
NetC44_2: C44.2 R55.2 R57.1 | length 210
  Top Layer w10: C44.2 R57.1 R55.2
NetC47_1: C47.1 U12.3 | length 160.2
  Top Layer w10: U12.3 6335,7105 C47.1
NetC47_2: C47.2 U12.1 | length 249.3
  Top Layer w10: U12.1 6328,7005 6368,6965 6464,6965 6485,6986 C47.2
NetC48_1: C48.1 U12.2 | length 197.9
  Top Layer w10: C48.1 6218,7031 6242,7055 U12.2
NetC50_1: C50.1 U12.5 | length 232.2
  Top Layer w10: U12.5 6355,7205 6390,7170 6447,7170 6485,7132 C50.1
NetC50_2: C50.2 U12.4 | length 139.5
  Top Layer w10: U12.4 6345,7155 6380,7120 C50.2
NetC51_2: C51.2 U12.6 | length 139.5
  Top Layer w10: U12.6 6385,7255 C51.2
NetC53_2: C53.2 D5.1 R82.2 U13.2 | length 311.9
  Top Layer w20: C53.2 6079,7760 6110,7729 U13.2
  Top Layer w30: D5.1 6044.25,7775.75 C53.2
NetD1_2: D1.2 R5.2 | length 75
  Top Layer w40: D1.2 R5.2
NetD4_1: D4.1 R39.2 | length 112.1
  Top Layer w30: R39.2 8425,6449.81 D4.1
NetD5_2: D5.2 R77.1 R80.2 R82.1 U14.4 | length 905.8
  Top Layer w20: D5.2 5940.75,7675.75 R82.1 ; v1(5900,7650) 5900,7675.75 ; U14.4 6417,7617 R80.2 R77.1 ; 6360,7617 v1(6360,7650)
  Bottom Layer w20: v1(5900,7650) 5980,7730 6280,7730 v1(6360,7650)
NetD6_1: D6.1 R83.1 | length 90
  Top Layer w20: D6.1 R83.1
NetD7_1: D7.1 R85.1 | length 90
  Top Layer w20: D7.1 R85.1
NetD8_1: D8.1 R87.1 | length 90
  Top Layer w20: D8.1 R87.1
NetJ7_1: J7.1 R69.1 R73.1 R75.1 | length 889.1
  Top Layer w30: R75.1 10200,7540 J7.1 ; R69.1 v1(10140,7820) ; R73.1 v1(10140,8040)
  Bottom Layer w30: v1(10140,8040) v1(10140,7820) 10280,7680 J7.1
NetJ7_2: J7.2 R71.1 R74.1 R76.1 | length 860.4
  Top Layer w30: R76.1 10200,7740 10200,8080 R74.1 ; R71.1 10197.8,7960 ; 10200.2,7817.8 J7.2
NetL1_1: L1.1 U1.3 | length 212.3
  Top Layer w80: 6475,8142 6565,8232 L1.1
NetQ1_1: Q1.1 R11.1 R12.1 | length 182.1
  Top Layer w30: Q1.1 8419,7154 R12.1
NetQ2_1: Q2.1 R23.1 | length 91.8
  Top Layer w30: Q2.1 6136,6361 R23.1
NetR12_2: R12.2 TR1.3 | length 167.5
  Top Layer w30: R12.2 8560,6903 TR1.3
NetR14_1: R14.1 R15.2 TR1.1 | length 182.5
  Top Layer w30: R14.1 8474,6875 TR1.1
NetR16_1: R16.1 U5.64 | length 115.1
  Top Layer w10: U5.64 7285.64,6945.36 R16.1
NetR25_1: R25.1 R26.2 TR2.1 | length 205.1
  Top Layer w30: R25.1 9955,7230 TR2.1 9950,7234 TR2.1@9955,7229
NetR32_1: R32.1 R41.2 U7.4 | length 196.1
  Top Layer w20: R41.2 8220,6608 8242,6630 R32.1
NetR36_1: R36.1 U8.3 | length 196.9
  Top Layer w30: R36.1 9752,6676 9788,6640 U8.3
NetR36_2: R36.2 U8.6 | length 201.2
  Top Layer w30: U8.6 9660,6640 9687,6667 R36.2
NetR37_1: R37.1 U9.3 | length 236.7
  Top Layer w30: R37.1 8880,6720 8880,6644 8919,6605 U9.3
NetR37_2: R37.2 R38.2 U8.7 | length 948.8
  Top Layer w20: R38.2 9200,6820 9300,6720 9300,6620 9322,6598 9563,6598 9571,6590 U8.7
NetR38_1: R38.1 U9.5 | length 138.3
  Top Layer w30: U9.5 8778,6655 8815,6692 R38.1
NetR39_1: R39.1 U7.3 | length 100
  Top Layer w20: U7.3 R39.1
NetR42_2: R42.2 R43.1 U8.5 | length 235.5
  Top Layer w20: R42.2 9534,6655 9569,6690 U8.5
NetR45_2: R45.2 R47.1 U10.10 | length 204
  Top Layer w20: R47.1 U10.10@8265,7564
NetR50_2: R50.2 U10.4 | length 138.2
  Top Layer w10: U10.4 8543.06,7628.06 R50.2
NetR51_2: R51.2 U11.2 | length 125.5
  Top Layer w15: U11.2 9197.41,7597.59 R51.2
NetR52_1: R52.1 R54.2 U11.7 | length 295.6
  Top Layer w10: R52.1 R54.2 ; 8750,7609 8878,7609 8889.41,7597.59 U11.7
NetR53_2: R53.2 U11.3 | length 125.2
  Top Layer w15: U11.3 9198.18,7623.18 R53.2
NetR54_1: R54.1 U11.6 | length 141.1
  Top Layer w10: R54.1 8860,7660 8896.82,7623.18 U11.6
NetR57_2: R57.2 U10.5 | length 196.3
  Top Layer w10: U10.5 8450,7690 8520,7760 R57.2
NetR58_2: R58.2 R59.1 R102.2 | length 265
  Top Layer w30: R102.2 R58.2
NetR59_2: R59.2 R60.1 R103.2 | length 265
  Top Layer w30: R103.2 R60.1
NetR62_1: R62.1 R64.1 R106.2 | length 265
  Top Layer w30: R106.2 R62.1 R64.1
NetR66_2: R66.2 R107.2 | length 165
  Top Layer w30: R107.2 R66.2
NetR67_1: R67.1 U12.11 | length 211.4
  Top Layer w10: R67.1 6000,7170 6000,7222 6033,7255 U12.11
NetR68_1: R68.1 U12.12 | length 259.6
  Top Layer w10: R68.1 6020,7090 6020,7189 6036,7205 U12.12
NetR70_1: R70.1 U12.10 | length 168.4
  Top Layer w20: R70.1 5950,7234 6021,7305 U12.10
NetR72_1: R72.1 U12.9 | length 139.5
  Top Layer w20: R72.1 5985,7355 U12.9
NetR78_2: R78.2 R79.2 U14.1 | length 219
  Top Layer w20: U14.1 6420,7467 ; R78.2 R79.2
NetU13_4: U13.4 U14.2 U14.3 | length 236.9
  Top Layer w20: U13.4 6260,7674 6230,7644 6230,7602 6265,7567 U14.3 U14.2
P2.4: U5.24
P2.5: U5.25
P2.6: U5.26
P2.7: U5.27
P3.0: R19.1 U5.28 | length 121.9
  Top Layer w10: U5.28 7069.1,7544.1 R19.1
P4.2: J2.1 U5.38 | length 1316
  Top Layer w10: J2.1 6245,6453.74 6245,6492 6280,6527 6280,6680 6565,6965 6565,7165 6707.21,7307.21 U5.38
P4.3: J2.2 U5.39 | length 1165.6
  Top Layer w10: J2.2 6300,6479.26 6300,6660 6590,6950 6590,7158 6719.53,7287.53 U5.39
P4.4: J2.3 U5.40 | length 1214
  Top Layer w10: J2.3 6339,6438.48 6339,6661 6610,6932 6610,7141 6736.84,7267.84 U5.40
P4.5: J2.4 U5.41 | length 1076.8
  Top Layer w10: J2.4 6377.85,6664.85 6630,6917 6630,7130 6748.16,7248.16 U5.41
P4.6: J2.5 U5.42 | length 1126.8
  Top Layer w10: J2.5 6418,6438.22 6418,6662 6654,6898 6654,7120 6762.47,7228.47 U5.42
P4.7: J2.6 U5.43 | length 988.6
  Top Layer w10: J2.6 6456.59,6663.59 6680,6887 6680,7113 6775.79,7208.79 U5.43
P5.0: J2.7 U5.44 | length 1036.9
  Top Layer w10: J2.7 6496,6438.96 6496,6663 6700,6867 6700,7095 6794.1,7189.1 U5.44
P5.1: J2.8 U5.45 | length 896.9
  Top Layer w10: J2.8 6535.33,6659.33 6725,6849 6725,7085 6809.42,7169.42 U5.45
P5.2: J2.9 U5.46 | length 945.4
  Top Layer w10: J2.9 6576,6437.7 6576,6660 6751,6835 6751,7075 6825.73,7149.73 U5.46
P5.3: J2.10 U5.47 | length 808.8
  Top Layer w10: J2.10 6614.07,6661.07 6775,6822 6775,7068 6837.05,7130.05 U5.47
P5.4: J2.11 U5.48 | length 858.6
  Top Layer w10: J2.11 6653,6439.44 6653,6660 6800,6807 6800,7057 6853.36,7110.36 U5.48
P5.5: J2.12 U5.49 | length 741.4
  Top Layer w10: J2.12 6692.81,6662.81 6827,6797 6827,6986 6862.78,7021.78 U5.49
P5.6: J2.13 U5.50 | length 822.6
  Top Layer w10: J2.13 6733,6438.18 6733,6666 6849,6782 6849,6948 6876,6975 6995,6975 7010.05,6990.05 U5.50
P5.7: J2.14 U5.51 | length 711.9
  Top Layer w10: J2.14 6771.55,6659.55 6872,6760 6872,6920 6906,6954 7011,6954 7029.73,6972.73 U5.51
PWR_ADC: R14.2 U5.23 | length 1658.9
  Top Layer w10: v1(7160,7140) 7167.53,7147.53 U5.23
  Top Layer w20: v1(8040,6780) 8270,6780 R14.2
  Bottom Layer w20: v1(7160,7140) 7680,7140 v1(8040,6780)
PWR_MAIN: R2.1 U1.1 U5.20 | length 1137.3
  Top Layer w10: U5.20 7226.58,7541.58 v1(7240,7555)
  Top Layer w20: U1.1 6465,7977.06 R2.1
  Bottom Layer w20: v1(6465,7988) 6807,7988 v1(7240,7555)
PWR_MCU: R8.1 U2.3 U5.21 | length 791
  Top Layer w10: U5.21 7206.9,7566.9 7225,7585 v1(7300,7585)
  Top Layer w20: U2.3 7045,7993.28 R8.1
  Bottom Layer w20: v1(7060,7980) 7300,7740 v1(7300,7585)
PWR_ZIGBEE: R9.1 U3.3 U5.22 | length 1316.3
  Top Layer w10: U5.22 7187.21,7607.21 7200,7620 v1(7420,7620)
  Top Layer w20: R9.1 7988.11,8273.11 U3.3
  Bottom Layer w20: v1(7420,7620) 7988,8188 v1(7988,8240)
RED: J6.1 RE1.6 | length 1429
  Bottom Layer w30: RE1.6 10060,7266.4 10060,8040 10140,8120 J6.1
RED_R: C34.2 RE1.5 | length 599.2
  Top Layer w20: RE1.5 10082.21,6937.79 10140,6880 10140,6720 10108,6688 C34.2
RED_T: RE1.7 U6.6 U6.7 | length 546
  Top Layer w20: U6.6 U6.7 9402,7142 9430,7170 9759.02,7170 RE1.7
RESET: C27.2 JP1.11 R24.1 S1.2 U5.58 | length 1322.8
  Top Layer w10: U5.58 7167.53,6986.47 7579,6575 ; 7579,6750 C27.2 ; JP1.11 7579,6462.7 7579,6772 R24.1 7609,6894 S1.2 S1.2@7682,6894
RESISTOR+: R63.1 R75.2 | length 150
  Top Layer w30: R63.1 R75.2
RESISTOR-: R65.2 R66.1 R76.2 | length 405
  Top Layer w30: R65.2 R66.1 R76.2
RS232RX0: J3.2 U12.13 | length 940.8
  Top Layer w10: J3.2 5730,7657.2 5730,7557 5887,7400 6120,7400 6140,7380 6140,7173 6122,7155 U12.13
RS232RX1: J4.2 U12.8 | length 755.8
  Top Layer w20: v1(6230,7355) U12.8
  Bottom Layer w20: J4.2 5740,7202.2 5740,7280 5815,7355 v1(6230,7355)
RS232TX0: J3.1 U12.14 | length 1147.5
  Top Layer w10: J3.1 5750,7775 5750,7570 5900,7420 6134,7420 6160,7394 6160,7140 6125,7105 U12.14
RS232TX1: J4.1 U12.7 | length 861.1
  Top Layer w20: U12.7 v1(6370,7305)
  Bottom Layer w20: J4.1 5800,7400 6275,7400 v1(6370,7305)
SHIELD: C52.2 J6.3 | length 239.6
  Top Layer w30: C52.2 J6.3@10339.59,8396
SPI1_CS1: R19.2 U10.7 | length 1151.1
  Top Layer w10: R19.2 8133,7660 8164.94,7628.06 U10.7
SPI1_MISO: R18.2 U10.8 | length 1478.4
  Top Layer w10: R18.2 7030,7663 7067,7700 7180,7700 7200,7680 8160,7680 8195,7715 8288,7715 8325,7678 8325,7625 8308.37,7608.37 U10.8
SPI1_SCK: R17.2 U10.9 | length 1649
  Top Layer w10: R17.2 7000,7720 7200,7720 7220,7700 8140,7700 8175,7735 8305,7735 8345,7695 8345,7612 8321.68,7588.69 U10.9
TCK: JP1.7 U5.57 | length 727.2
  Top Layer w10: U5.57 7147.84,6972.16 7421,6699 7421,6463.22 JP1.7
TDI: JP1.3 U5.55 | length 678.2
  Top Layer w10: U5.55 7108.47,6944.53 7264,6789 7264,6462.74 JP1.3
TDO: JP1.1 U5.54 | length 653.8
  Top Layer w10: U5.54 7088.79,6931.21 7175,6845 7175,6473 JP1.1
TMS: JP1.5 U5.56 | length 702.7
  Top Layer w10: U5.56 7128.16,6960.84 7342,6747 7342,6463.48 JP1.5
VOLTAGE+: R58.1 R69.2 | length 205
  Top Layer w30: R58.1 R69.2
VOLTAGE-: R60.2 R71.2 | length 205
  Top Layer w30: R60.2 R71.2
VW_DRIVE: U5.37 U6.2 | length 2617.6
  Top Layer w10: U5.37 6933.1,7326.9 v1(6980,7280)
  Top Layer w20: U6.2 v1(9220,7142)
  Bottom Layer w20: v1(6980,7280) 7340,7280 7510,7450 7570,7450 7878,7142 v1(9220,7142)
VW_RE: R40.2 U5.13 U7.1 | length 1450.4
  Top Layer w10: U5.13 7473.42,7346.58 v1(7480,7340)
  Top Layer w20: R40.2 8325,6457 U7.1
  Bottom Layer w20: v1(7480,7340) 7560,7340 8325,6575 v1(8325,6500)
VW_TRCN: R25.2 U5.14 | length 3078
  Top Layer w10: U5.14 7446.27,7366.27 7480,7400 v1(7520,7400)
  Top Layer w20: R25.2 v1(10080,7040)
  Bottom Layer w20: v1(7520,7400) 7560,7400 8050,6910 9530,6910 9580,6860 9900,6860 v1(10080,7040)
VWTRCN: D2.1 RE1.8 TR2.3 | length 333.3
  Top Layer w30: D2.1 9962.99,7340 TR2.3 ; RE1.8 9818,7340
WHITE: J6.5 R56.2 U10.3 | length 2460.3
  Top Layer w10: U10.3 8526.63,7608.37 R56.2
  Top Layer w20: v1(8530,7560) R56.2
  Bottom Layer w20: v1(8530,7560) 8640,7560 9450,8370 10038.82,8370 J6.5
ZIGBEECTS: R92.1 R98.2 | length 1573.2
  Top Layer w30: R92.1 v1(9300,9500) ; R98.2 v1(9800,8520)
  Bottom Layer w30: v1(9300,9500) 9300,9360 9660,9000 9860,9000 9980,8880 9980,8700 v1(9800,8520)
ZIGBEECTS0: B2.16 R98.1 | length 185.8
  Top Layer w20: B2.16 9625.17,8520 R98.1
ZIGBEECTS1: B2.33 D7.2 R92.2 | length 1052.9
  Top Layer w20: D7.2 8670,9295.04 8670,9190 8710,9150 9110,9150 9129.17,9169.17 9129.17,9252.17 9167,9290 9270,9290 9300,9320 R92.2
ZIGBEEMISO: B2.7 R95.2 S5.1 | length 1490
  Top Layer w20: R95.2 9029.17,8395 9029.17,8549.17 9060,8580 9460,8580 9600,8440 9840,8440 9905,8505 S5.1
ZIGBEERTS: R91.1 R99.2 | length 1464.9
  Top Layer w30: R91.1 v1(9200,9500) ; R99.2 v1(9800,8620)
  Bottom Layer w30: v1(9200,9500) 9200,9380 9640,8940 9840,8940 9920,8860 9920,8740 v1(9800,8620)
ZIGBEERTS0: B2.17 R99.1 | length 165.1
  Top Layer w20: B2.17 9629.17,8666 R99.1
ZIGBEERTS1: B2.34 R91.2 | length 205.4
  Top Layer w20: B2.34 9079.17,9254.17 R91.2 R91.2@9195,9375
ZIGBEERX: R21.2 R88.1 R101.2 | length 4586.8
  Top Layer w30: v1(6660,7500) 6696,7500 R21.2 ; R88.1 v1(9000,9500) ; R101.2 v1(9800,8820)
  Bottom Layer w20: v1(6660,7500) 6700,7460 7320,7460 8680,8820 v1(9800,8820) ; 9000,8820 v1(9000,9500)
ZIGBEERX0: B2.19 R101.1 | length 168.4
  Top Layer w20: B2.19 9621.17,8766 R101.1
ZIGBEERX1: B2.36 R88.2 | length 159
  Top Layer w20: B2.36 8979.17,9354.17 R88.2
ZIGBEETX: R20.2 R89.1 R100.2 | length 5110.5
  Top Layer w20: v1(6660,7390) 6672,7378 R20.2
  Top Layer w30: R89.1 v1(9100,9500) ; R100.2 v1(9800,8720)
  Bottom Layer w20: v1(6660,7390) 6690,7420 7340,7420 8640,8720 v1(9800,8720)
  Bottom Layer w30: v1(9100,9500) 9100,9400 9620,8880 9820,8880 9860,8840 9860,8780 v1(9800,8720)
ZIGBEETX0: B2.18 R100.1 | length 147.7
  Top Layer w20: B2.18 9671.17,8716 R100.1
ZIGBEETX1: B2.35 R89.2 | length 179.7
  Top Layer w20: B2.35 9029.17,9304.17 R89.2
pads on no net: B2.1 B2.2 B2.3 B2.4 B2.5 B2.6 B2.8 B2.10 B2.11 B2.12 B2.15 B2.20 B2.23 B2.27 B2.28 B2.30 B2.31 B2.37 B2.38 B2.39 B2.40 B2.41 J2.15 J2.16 J2.17 J2.18 J2.19 J2.20 JP1.4 JP1.6 JP1.8 JP1.10 JP1.12 JP1.13 JP1.14 U4.1 U4.3 U4.5 U4.7 U4.8 U5. U5.3 U5.4 U5.5 U5.6 U5.7 U5.10 U5.11 U5.12 U5.15 U5.16 U5.17 U5.18 U5.19 U5.61 U11.1 U13.1

## Polygon pours and split planes (outlines as drawn)
DGND on Top Layer "GND" (solid, remove dead copper, pour order 2): 5100,6300 10900,6300 10900,9700 5100,9700 5100,6300
DGND on Bottom Layer "GND" (solid, remove dead copper, pour order 4): 5100,6300 10900,6300 10900,9700 5100,9700 5100,6300

## Keep-outs
Keep-Out Layer:
  lines w10: 7719.81,8539.76 5560.02,8539.76 cw(c5560.02,8639.97) 5459.81,8639.97 5459.81,8944.76 5126,8944.76 5126,7999.88 5126,7055 cw(c5126,6700.67) 5480.33,6700.67 5480.33,6406.97 ccw(c5580.33,6406.97) 5580.33,6306.97 10419.7,6306.97 ccw(c10419.7,6406.97) 10519.7,6406.97 10519.7,6700.67 cw(c10874.03,6700.67) 10874.03,7055 10874.03,7999.88 10874.03,8944.76 cw(c10874.03,9299.1) 10519.7,9299.1 10519.7,9592.8 ccw(c10419.7,9592.8) 10419.7,9692.8 7920.02,9692.8 ccw(c7920.02,9592.97) 7820.19,9592.97 ; 7720.02,8539.97 ccw(c7720.02,8639.97) 7820.02,8639.97 7820.02,9592.8

## Other copper
Top Layer:
  rectangle net +VIN: 8037,7071 8194,7269
  rectangle net +VIN: 8180,7243 8230,7269
  rectangle net +VIN: 7860,7730 8007,7820

## Silkscreen, mask and mechanical layers (free items; w line width, h text height)
Top Overlay:
  text "WHITE" at 10530,8630 h60
  text "GREEN" at 10525,8500 h60
  text "A" at 5325,8395 h60
  text "SHIELD" at 10525,8365 h60
  text "B" at 5325,8260 h60
  text "BLACK" at 10530,8230 h60
  text "GND" at 5265,8115 h60
  text "-" at 5930,8110 h100
  text "+" at 6080,8110 h100
  text "RED" at 10580,8085 h60
  text "232TX0" at 5185,7830 h60
  text "V_I_R-" at 10520,7800 h60
  text "232RX0" at 5180,7680 h60
  text "V_I_R+" at 10525,7650 h60
  text "GND" at 5245,7545 h60
  text "232TX1" at 5195,7315 h60
  text "RX1" at 5365,7130 h60
  text "GND" at 5335,6995 h60
Mechanical 1:
  lines w10: 7719.8,8539.8 5560,8539.8 cw(c5560,8640) 5459.8,8640 5459.8,8944.8 5125.98,8944.8 5125.98,7999.91 5125.98,7055.03 cw(c5125.98,6700.7) 5480.31,6700.7 5480.31,6407 ccw(c5580.31,6407) 5580.31,6307 10419.68,6307 ccw(c10419.68,6407) 10519.68,6407 10519.68,6700.7 cw(c10874.01,6700.7) 10874.01,7055.03 10874.01,7999.91 10874.01,8944.8 cw(c10874.01,9299.13) 10519.68,9299.13 10519.68,9592.83 ccw(c10419.68,9592.83) 10419.68,9692.83 7920,9692.83 ccw(c7920,9593) 7820.17,9593 ; 7720,8540 ccw(c7720,8640) 7820,8640 7820,9592.83

## Text inside footprints (layer, text, board x,y; h text height)
B1: Top Overlay "+" at 5840,6740 h60 r180
B2: Top Overlay "M01-M03" at 8429.17,8566 h100 r90; Top Overlay "M02-M04" at 7979.17,8566 h100 r90
BT1: Top Overlay "-" at 7545,8247 h60 r180; Top Overlay "+" at 7545,8472 h60 r180
RE1: Top Overlay "1" at 9668,7242 h30 r270; Top Overlay "8" at 9768,7227 h30 r90